# Altium PCB lpc4357-save.PcbDoc
Units mil, origin at the board's own origin, x right, y up, seen from the top; angles counter-clockwise.
Board outline 750 x 1050 mil, 2 copper layers (Top Layer, Bottom Layer), stack 61.7 mil thick; 9 components, 12 nets, 42 pads, 14 vias.
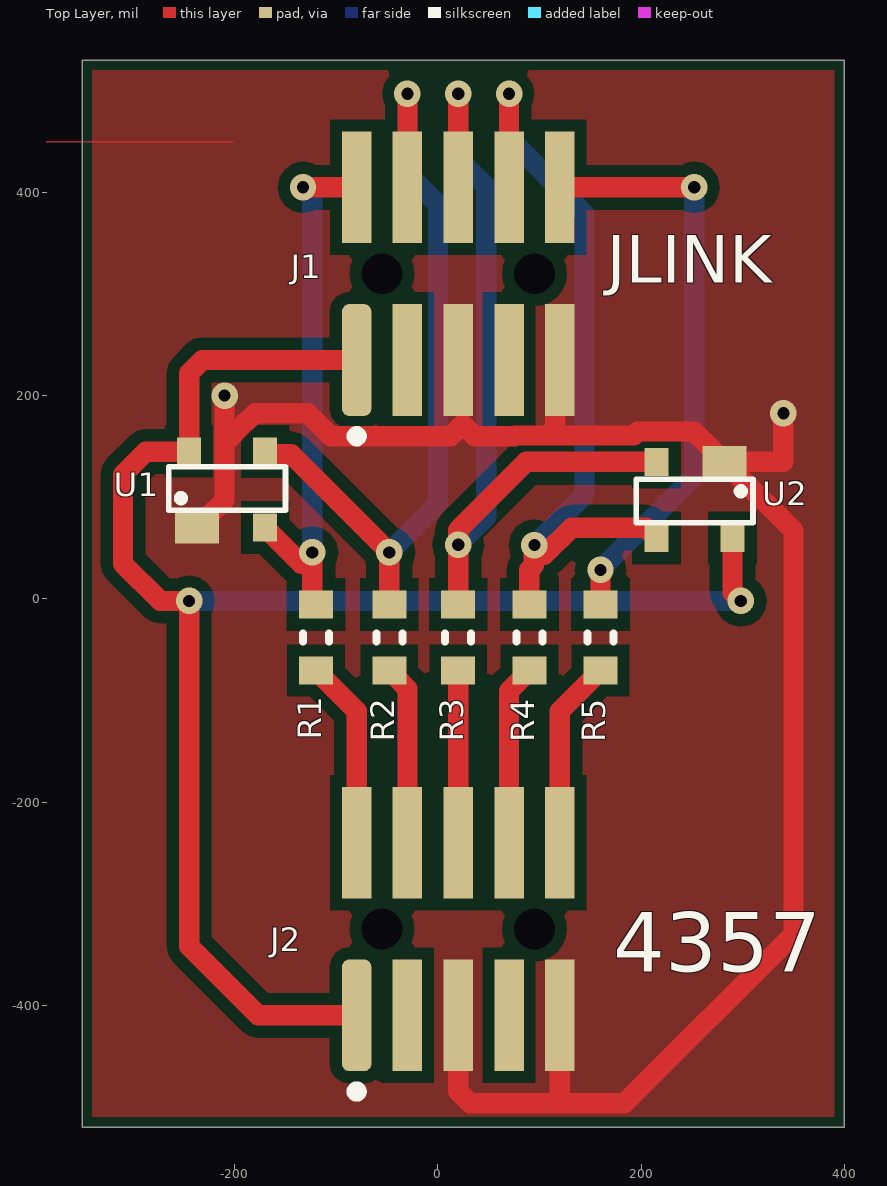
[diagram p0: Top Layer view]
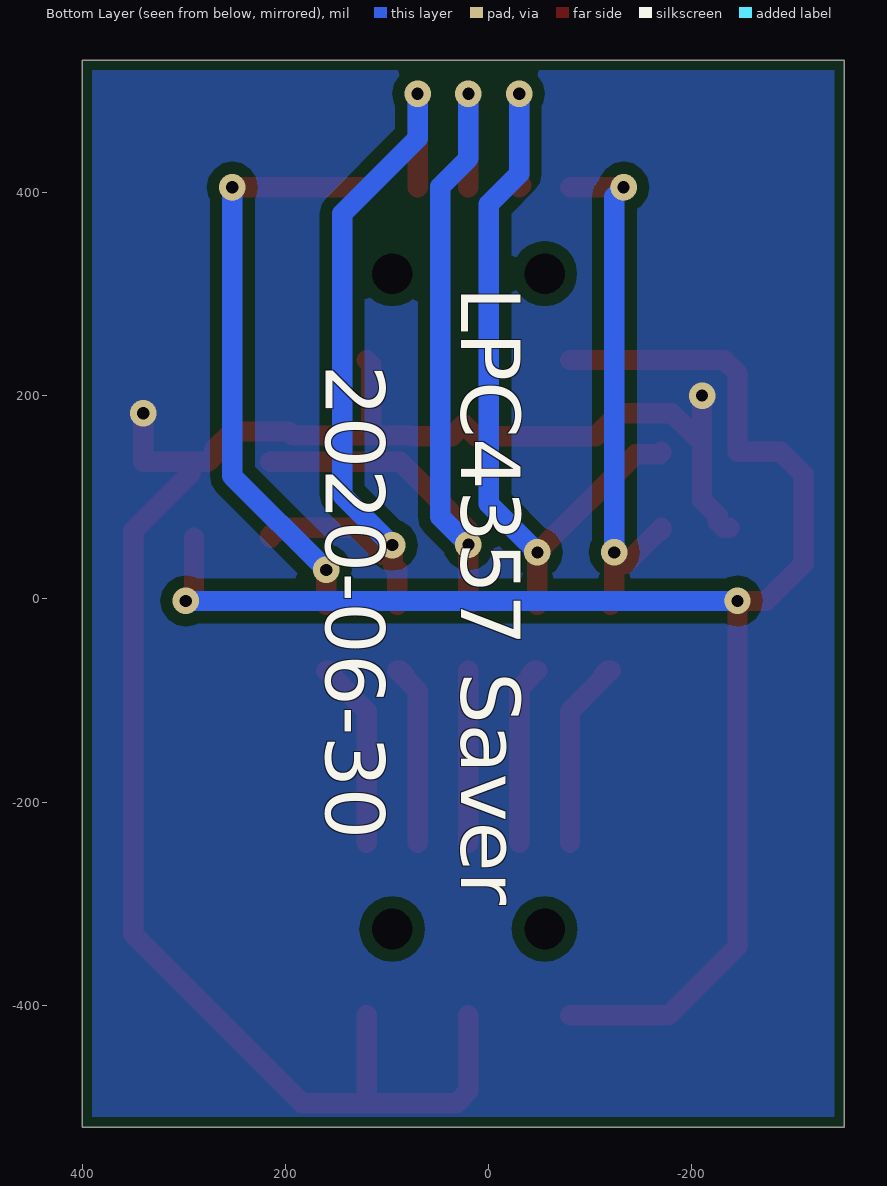
[diagram p1: Bottom Layer view, seen from below]
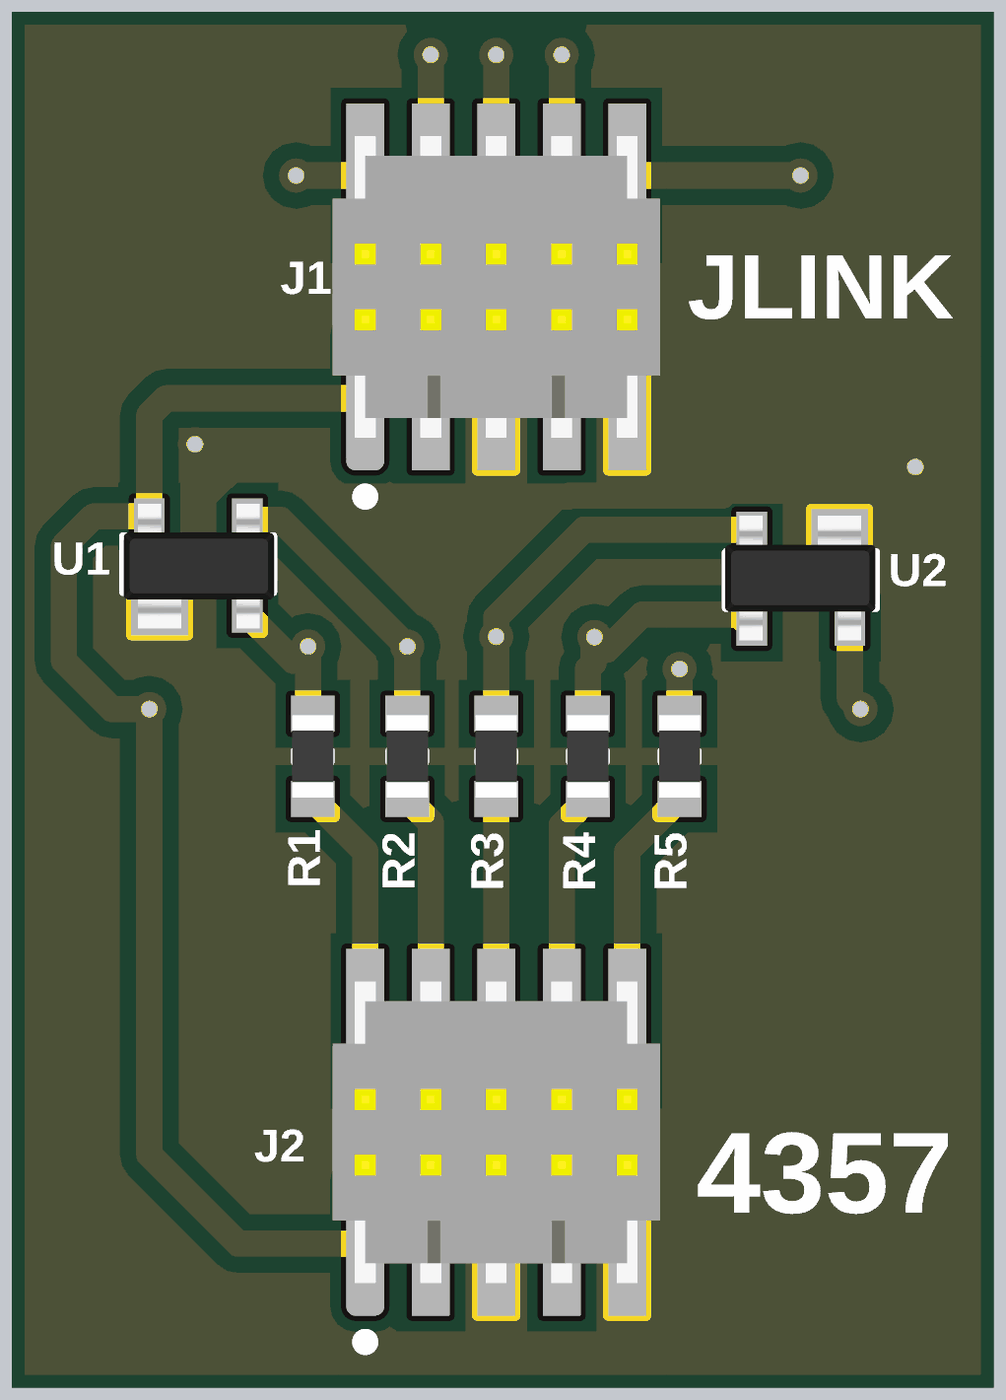
[diagram p2: 3D render of the assembled board from above, using the file's embedded part models]

## Layer stack, top to bottom
Top Solder: solder mask 0.4, Solder Resist, Dk 3.5
Top Layer: signal copper 1.4
Dielectric1: dielectric 58.9, FR-4, Dk 4.8
Bottom Layer: signal copper 1.4
Bottom Solder: solder mask 0.4, Solder Resist, Dk 3.5

## Board outline
-350,-520 -350,530 400,530 400,-520

## Design rules (kind name [scope] priority, off if disabled: settings)
Clearance MouseBites [HasPad('Free-MB') vs OnLayer('Keep-Out Layer')] p1: gap=0 ignorepadtopadclearanceinfootprint=FALSE
Clearance [All] p2: gap=6 ignorepadtopadclearanceinfootprint=FALSE except(12: Arc-Poly Track-Poly SMDPad-Poly THPad-Poly Via-Poly Fill-Poly Poly-Poly Poly-Region)
ComponentClearance ComponentClearance_1 [InComponent('J1') vs InComponent('U1')] p1: gap=0 collisioncheckmode=3 verticalgap=0 showdistances=FALSE
ComponentClearance [All] p2: gap=10 collisioncheckmode=3 verticalgap=10 showdistances=FALSE
HoleSize [All] p1: absolutevalues=TRUE maxlimit=500 minlimit=1 maxpercent=80.000 minpercent=20.000
HoleToHoleClearance [HasPad('Free-MB')] p1: gap=0 allowstackedmicrovias=TRUE
MinimumSolderMaskSliver [All] p1: minsoldermaskwidth=0
NetAntennae NetAntennae_1 [InNet('ZA')] p1: netantennaetolerance=500
NetAntennae [All] p2: netantennaetolerance=0
PolygonConnect [All] p1: connectstyle=Direct reliefconductorwidth=10 reliefentries=4 polygonreliefangle="90 Angle" airgapwidth=10
RoutingVias [All] p1: holewidth=12 width=26 viastyle="Through Hole" minholewidth=12 minwidth=26 maxholewidth=50 maxwidth=75
ShortCircuit ShortCircuit_1 [HasFootprint('SMTSO-632-2ET') vs HasFootprint('SMTSO-632-2ET')] p1: allowed=TRUE
ShortCircuit [All] p2: allowed=FALSE
SilkToSolderMaskClearance SilkscreenOverComponentPads [IsPad] p1: minsilkscreentomaskgap=10 clearancetoexposedcopper=TRUE
SolderMaskExpansion [All] p1: expansion=4 istentingtop=FALSE
UnConnectedPin [InNet('MouseBite')] p1:
Width [All] p1: maxlimit=200 minlimit=6 preferedwidth=6
23 further rules are at their usual default settings.

## Components (designator, comment, footprint, x,y, rotation, side; value= is the part's Value field where it differs from the comment)
J1 "FTSH-105-01-F-DV-K-A" FTSH-105-01-F-DV-K-A 20,320 r0 top
J2 "FTSH-105-01-F-DV-K-A" FTSH-105-01-F-DV-K-A 20,-325 r0 top
R1 "2.2k" R0603_0.55MM_MD -120,-38.19 r90 top
R2 "2.2k" R0603_0.55MM_MD -47.88,-38.19 r90 top
R3 "2.2k" R0603_0.55MM_MD 20,-38.19 r90 top
R4 "2.2k" R0603_0.55MM_MD 90,-38.19 r90 top
R5 "2.2k" R0603_0.55MM_MD 160,-38.19 r90 top
U1 "PRTR5V0U2X,215" SOT143B -237,70 r0 top
U2 "PRTR5V0U2X,215" SOT143B 282.13,134.8 r180 top

## Footprints (in the part's own frame and the unit in brackets; to place one, negate y for a bottom-side part, rotate by r counter-clockwise, add the part's x,y. Pads: shape width x height; smd on the part's side, far side on the other; paste and mask are expansions set on the pad)
FTSH-105-01-F-DV-K-A [mil] "Samtec FTSH-105-01-F-DV-K-A SMT Connector"
  rrect50% 29x110 smd: 1(-100,-85)
  rect 29x110 smd: 2(-100,85) 3(-50,-85) 4(-50,85) 5(0,-85) 6(0,85) 7(50,-85) 8(50,85) 9(100,-85) 10(100,85)
  round 5 hole 40 unplated mask+20: A(-75,0) A(75,0)
  silkscreen extent -105,-165 -95,-155, body extent -125,-115 125,115, height 241
R0603_0.55MM_MD [mm] "Resistor 0603 Medium Density"
  rect 0.7x0.85 smd: 1(-0.825,0) 2(0.825,0)
  silkscreen extent -0.1,-0.33 0.1,0.33, body extent -0.8,-0.4 0.8,0.4, height 0.55
SOT143B [mm] "SOT143B"
  rect 1.1x0.8 smd: 1(0,0)
  rect 0.6x0.7 smd: 2(1.702,0) 3(1.702,1.9) 4(-0.2,1.9)
  silkscreen extent -0.71,0.43 2.21,1.52, body extent -0.7,-0.27 2.22,2.15, height 1

## Part data
J1 J2: "CONN HEADER 10POS DUAL .05\" SMD", Color=Black, Manufacturer="Samtec Inc", Supplier Part Number 1=FTSH-105-01-F-DV-K-A-ND, Category=Connectors, CategorySort=800, ComponentLink1Description=http://www.samtec.com/documents/webfiles/cpdf/FTSH-1XX-XX-XXX-DV-XXX-MKT.pdf, ComponentLink1URL=http://www.samtec.com/documents/webfiles/cpdf/FTSH-1XX-XX-XXX-DV-XXX-MKT.pdf, Connector Type="Header, Unshrouded", Contact Finish=Gold, Contact Finish Thickness="3µin (0.08µm)", Contact Mating Length="0.120\" (3.05mm)", Contact Type="Male Pin", Fastening Type=-, Features=-, Manufacturer Part Number=FTSH-105-01-F-DV-K-A, Mounting Type="Surface Mount", Number of Positions=10, Number of Positions Loaded=All, Number of Rows=2, Packaging=Tube, Pitch="0.050\" (1.27mm)", Pricing 1="1=3.59 (USD)", RoHS="RoHS Compliant", Row Spacing="0.050\" (1.27mm)", Stock 1=0, Supplier 1=Digi-Key, Termination=Solder
R1 R2 R3 R4 R5: library part ERJ-3EKF2201V, "RES 2.2K OHM 1/10W 1% 0603 SMD", Limiting Element Voltage=75, Manufacturer="Panasonic Electronic Components", Maximum Overload Voltage=150, Maximum Working Voltage=14.8V, Package="0603 (1608 Metric)", Package Power="0603  (0.1W)", Power (Watts)="0.1W- 1/10W", Ratings=AEC-Q200, Sort Value=2200, Sort Value Package=603_2200, Supplier Package=0603, Supplier Part Number 1=P2.20KHCT-ND, Temperature Coefficient=±100ppm/°C, Tolerance=±1%, Category=Resistors, ComponentLink1Description="Internal Datasheet", ComponentLink1URL="datasheets\Panasonic Electronic Components\AOA0000CE2.pdf", ComponentLink2Description="External Datasheet", ComponentLink2URL=http://industrial.panasonic.com/www-data/pdf/AOA0000/AOA0000CE2.pdf, Composition="Thick Film", Features=-, Height=0.55MM, Manufacturer Part Number=ERJ-3EKF2201V, Number of Terminations=2, Packaging="Cut Tape (CT)", Resistance (Ohms)=2.2k, Size / Dimension="0.063\" L x 0.031\" W (1.60mm x 0.80mm)", Substitution Notes="2.2k , ±1% , 0603 , AEC-Q200", Supplier 1=Digi-Key
U1 U2: "TVS DIODE 5.5VWM SOT143B", Capacitance @ Frequency="1pF @ 1MHz", Current - Peak Pulse (10/1000µs)=-, Manufacturer="NXP Semiconductors", Operating Temperature="-40°C ~ 85°C (TA)", Package / Case="TO-253-4, TO-253AA", Power Line Protection=Yes, Supplier Device Package=SOT-143B, Supplier Part Number 1=568-4140-1-ND, Voltage - Breakdown (Min)=6V, Voltage - Reverse Standoff (Typ)="5.5V (Max)", Applications="General Purpose", Bidirectional Channels=2, Category="Circuit Protection", ComponentLink1Description=http://www.nxp.com/documents/data_sheet/PRTR5V0U2X.pdf, ComponentLink1URL=http://www.nxp.com/documents/data_sheet/PRTR5V0U2X.pdf, Manufacturer Part Number=PRTR5V0U2X,215, Mounting Type="Surface Mount", Packaging="Cut Tape (CT)", Power - Peak Pulse=-, Pricing="1=0.57, 10=0.477, 25=0.418, 100=0.3578, 250=0.31036, 500=0.26286, 1000=0.20265 (USD)", RoHS="RoHS Compliant", Stock=11734, Supplier 1=Digi-Key, Type="Steering (Rail to Rail)", Unidirectional Channels=-, Voltage - Clamping (Max) @ Ipp=-

## Via types
v1: diameter 26, hole 12, Top Layer to Bottom Layer, tented both sides, 14 vias

## Nets (pads, with @x,y where several pads share a name; then routed paths per layer and width w, separated by ;. In a path a pad name is that pad's centre, name@x,y a point inside that pad or via, vN(x,y) a via of type N, cw(c..) or ccw(c..) an arc to the next point about the centre after c; other vN are vias at no path point)
+3V3: J1.1 J2.1 U1.4 U2.4 | length 1631.5
  Top Layer w20: J2.1 -177,-410 -244.87,-342.13 v1(-244.87,-2.09) -273.26,-2.09 -310,34.65 -310,122.29 -287.49,144.8 U1.4 -244.87,222.13 -232,235 J1.1 ; U2.4 290,6.03 v1(298.13,-2.09)
  Bottom Layer w20: v1(-244.87,-2.09) v1(298.13,-2.09)
\RST: J1.10 R5.2 | length 581.3
  Top Layer w20: J1.10 v1(252.35,405) ; R5.2 v1(160,28.5)
  Bottom Layer w20: v1(160,28.5) 252.35,120.85 v1(252.35,405)
GND: J1.5 J1.9 J2.5 J2.9 U1.1 U2.1 | length 1926.3
  Top Layer w20: U1.1 -231.09,70 -225.35,75.75 -225.35,81.65 -210,97 -210,153.02 ; v1(-210,200) -210,153.02 ; J2.5 20,-484.85 31.72,-496.57 120,-496.57 ; J2.9 120,-496.57 ; J1.9 115.5,230.5 115.5,168.02 108.28,160.8 ; v1(340,182.61) 340,134.8 U2.1@288.03,134.8 ; -210,153.02 -188.44,174.58 -188.02,174.58 -180,182.61 -128.11,182.61 -105.5,160 12.78,160 24.5,171.72 36.22,160 75.43,160 76.23,160.8 108.28,160.8 ; 108.28,160.8 192.91,160.8 196.69,164.58 252.35,164.58 270.47,146.46 270.47,140.55 276.22,134.8 U2.1 U2.1@288.03,134.8 ; 120,-496.57 183.43,-496.57 350,-330 350,66.93 293.78,123.15 293.78,129.05 U2.1@288.03,134.8
NetJ2_2: J2.2 R1.1 | length 187.6
  Top Layer w20: R1.1 -117.05,-70.67 -113.27,-74.45 -113.27,-77.4 -80,-110.67 J2.2
NetJ2_4: J2.4 R2.1 | length 178.5
  Top Layer w20: R2.1 -44.92,-70.67 -41.15,-74.45 -41.15,-77.4 -30,-88.55 J2.4
NetJ2_6: J2.6 R3.1 | length 169.3
  Top Layer w20: J2.6 R3.1
NetJ2_8: J2.8 R4.1 | length 179.3
  Top Layer w20: J2.8 70,-90.67 83.27,-77.4 83.27,-74.45 87.05,-70.67 R4.1
NetJ2_10: J2.10 R5.1 | length 187.6
  Top Layer w20: J2.10 120,-110.67 153.27,-77.4 153.27,-74.45 157.05,-70.67 R5.1
SWDCLK/TCLK: J1.4 R2.2 U1.3 | length 792.5
  Top Layer w20: U1.3 -170,144.11 -168.19,142.29 -144.49,142.29 v1(-47.88,45.68) R2.2 ; J1.4 -32.13,407.13 -30,409.26 v1(-30,497.09)
  Bottom Layer w20: v1(-47.88,45.68) 0,93.56 0,388.26 -30,418.26 v1(-30,497.09)
SWIO/TMS: J1.2 R1.2 U1.2 | length 520
  Top Layer w20: U1.2 -170,68.03 -168.19,66.22 -166.22,66.22 -134.65,34.65 ; v1(-132.8,405) J1.2 ; v1(-123.61,45.68) -123.61,-2.09 R1.2
  Bottom Layer w20: v1(-132.8,405) -123.61,395.82 v1(-123.61,45.68)
SWO/TDO: J1.6 R3.2 U2.2 | length 855.3
  Top Layer w20: R3.2 v1(20,53.14) 20,67.8 87,134.8 U2.2 ; J1.6 v1(20,497.09)
  Bottom Layer w20: v1(20,53.14) 47.56,80.7 47.56,405.79 20,433.35 v1(20,497.09)
TDI: J1.8 R4.2 U2.3 | length 775
  Top Layer w20: J1.8 v1(70,497.09) ; R4.2 90,28.5 94.27,32.77 94.27,52.13 v1(95,52.86) ; 104.68,43.18 131.5,70 205.13,70 211.35,63.78 213.31,63.78 215.13,61.97 U2.3
  Bottom Layer w20: v1(70,497.09) 70,453.35 144.25,379.09 144.25,102.11 v1(95,52.86)
pads on no net: J1.3 J1.7 J1.A J2.3 J2.7 J2.A

## Polygon pours and split planes (outlines as drawn)
GND on Top Layer "GND_L01_P031" (solid, remove dead copper, pour order 31): -340,520 390,520 390,-510 -340,-510
no net on Top Layer "NONET_L01_P024" (solid, remove dead copper, pour order 24): -201.28,450 -400,450 -201.49,450
GND on Bottom Layer "GND_L02_P033" (solid, pour order 33): -340,-510 -340,520 390,520 390,-510

## Silkscreen, mask and mechanical layers (free items; w line width, h text height)
Top Overlay:
  text "JLINK" at 165.94,295.81 h80
  text "4357" at 172.8,-386.39 h100
Bottom Overlay:
  text "LPC4357 Saver" at 46.38,307 h100 r90
  text "2020-06-30" at 179.49,230.5 h100 r90
[8] Board Outline:
  the board outline again, w10